# Altium PCB PCB3.PcbDoc
Units mil, origin at the board's own origin, x right, y up, seen from the top; angles counter-clockwise.
Board outline 2130.03 x 1040.03 mil, 2 copper layers (Top Layer, Bottom Layer); 10 components, 5 nets, 21 pads, 0 vias.
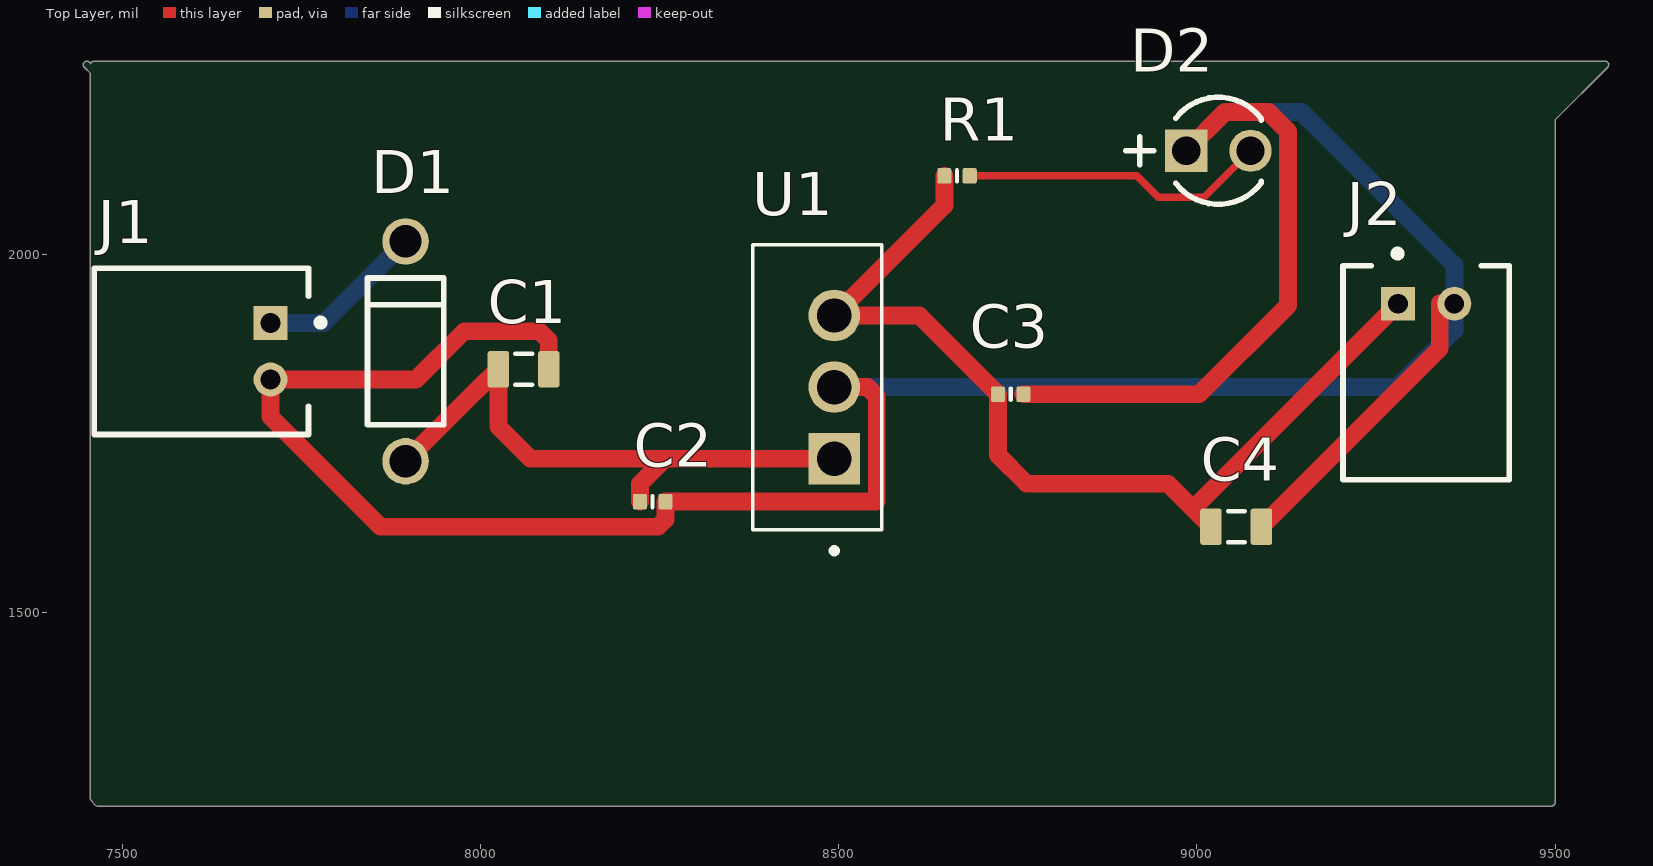
[diagram p0: Top Layer view]
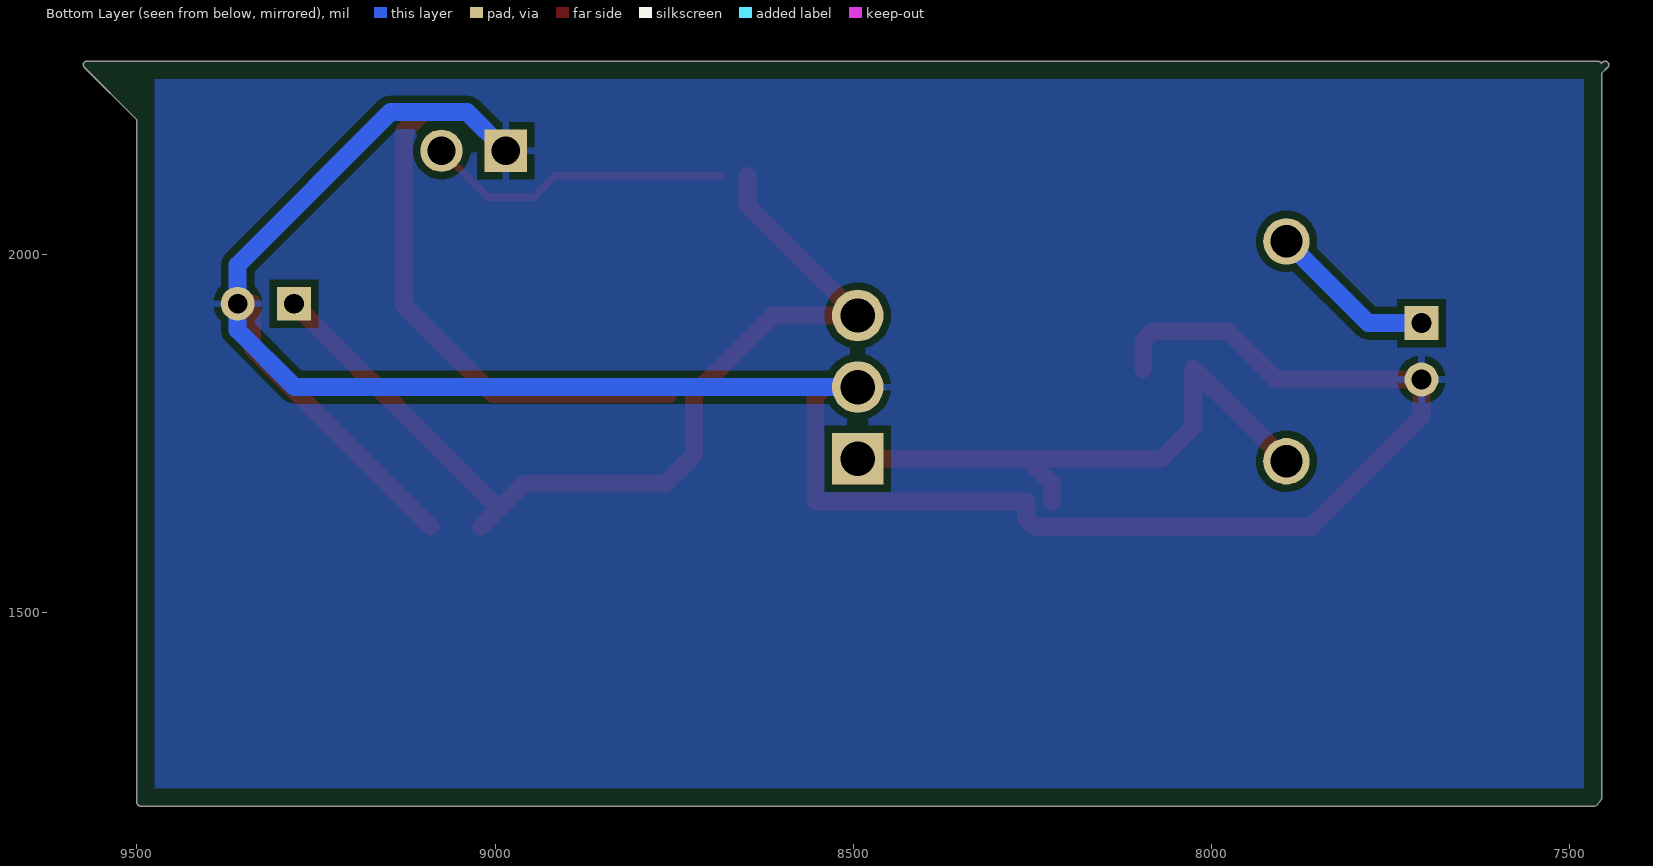
[diagram p1: Bottom Layer view, seen from below]
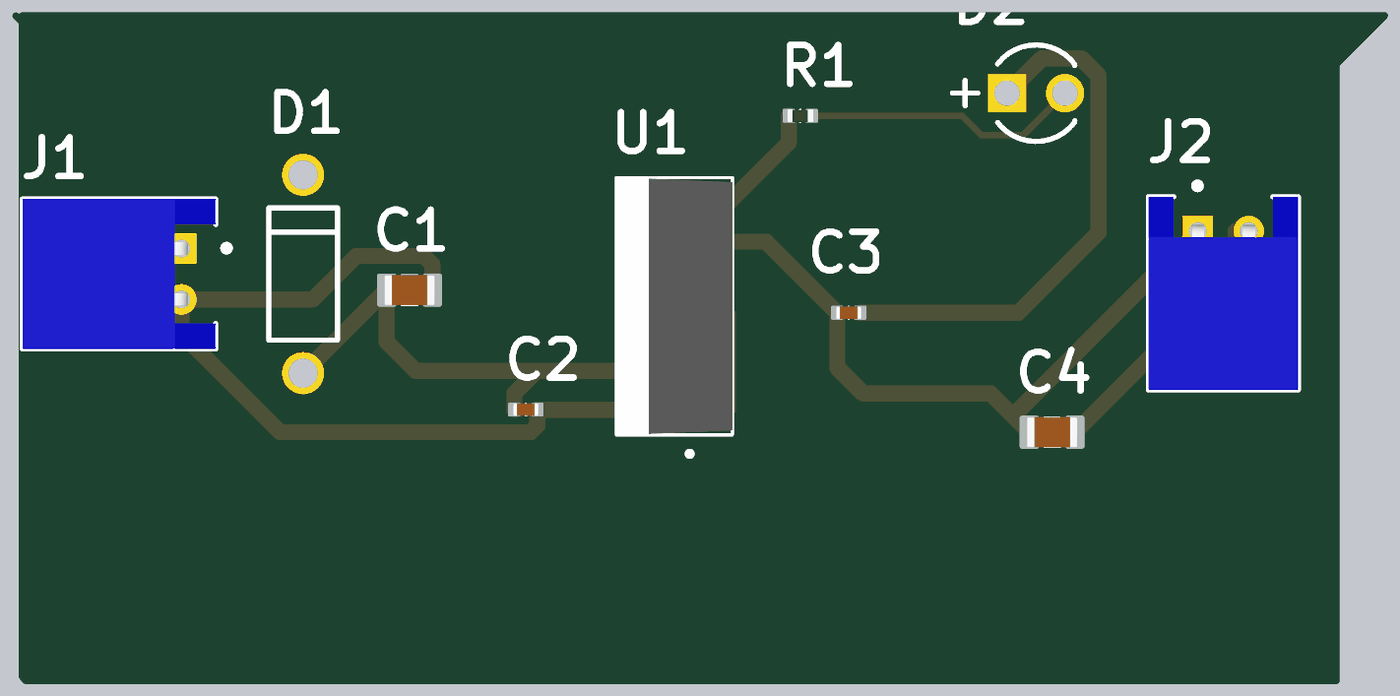
[diagram p2: 3D render of the assembled board from above, using the file's embedded part models]

## Layer stack, top to bottom
Top Solder: solder mask 0.4, Solder Resist, Dk 3.5
Top Layer: signal copper 1.4
Dielectric 1: dielectric 12.6, FR-4, Dk 4.8
Bottom Layer: signal copper 1.4
Bottom Solder: solder mask 0.4, Solder Resist, Dk 3.5

## Board outline
7454.98,1240 7454.98,2252.92 7446.45,2261.45 cw(c7450,2265) 7453.55,2268.55 7455.31,2266.78 cw(c7460,2265) 7460,2270.01 9570,2270.01 cw(c9570,2265) 9575.01,2265 9573.55,2261.45 9500.01,2187.92 9500.01,1235 cw(c9495,1235) 9495,1229.98 7465,1229.98 7461.45,1231.45

## Design rules (kind name [scope] priority, off if disabled: settings)
Clearance [All] p1: gap=10 ignorepadtopadclearanceinfootprint=FALSE
PolygonConnect [All] p1: connectstyle=Relief reliefconductorwidth=10 reliefentries=4 polygonreliefangle="90 Angle" airgapwidth=10
RoutingVias [All] p1: holewidth=28 width=50 viastyle="Through Hole" minholewidth=28 minwidth=50 maxholewidth=28 maxwidth=50
SolderMaskExpansion [All] p1: expansion=0 istentingtop=FALSE
SupplyNets "Schematic Supply Nets" [InNet('GND')] p1: voltage=0.000
Width Width_Power [InNetClass('Power')] p1: maxlimit=25 minlimit=25 preferedwidth=25
Width [All] p2: maxlimit=10 minlimit=10 preferedwidth=10
30 further rules are at their usual default settings.

## Classes and differential pairs
net class Power: GND NetC1_1 NetC3_1 NetD1_2

## Components (designator, comment, footprint, x,y, rotation, side; value= is the part's Value field where it differs from the comment)
C1 "Capacitor 10µF +/-20% 25V 0805" CAPC0805(2012)145_L 8060,1840 r0 top value=10µF
C2 "Capacitor 100nF +/-20% 25V 0402" CAPC0402(1005)60_L 8240,1655 r0 top value=100nF
C3 "Capacitor 100nF +/-20% 25V 0402" CAPC0402(1005)60_L 8740,1805 r0 top value=100nF
C4 "Capacitor 10µF +/-20% 25V 0805" CAPC0805(2012)145_L 9055,1620 r0 top value=10µF
D1 "1N4007" FAIR-DO-41-2 7895,1865 r90 top
D2 "304090041" LED-2P-2.28-3MM_A 9030,2145 r0 top
J1 "S2B-PH-K-S(LF)(SN)" JST-S2B-PH-K-S_V 7610,1865 r270 top
J2 "S2B-PH-K-S(LF)(SN)" JST-S2B-PH-K-S_V 9320,1835 r0 top
R1 "1KR2J" RESC0402(1005)_L 8665,2110 r0 top value=1k
U1 "LM7805T" TO254P1011X457X1950-3 8470,1815 r90 top

## Footprints (in the part's own frame and the unit in brackets; to place one, negate y for a bottom-side part, rotate by r counter-clockwise, add the part's x,y. Pads: shape width x height; smd on the part's side, far side on the other; paste and mask are expansions set on the pad)
CAPC0402(1005)60_L [mm] "Chip Capacitor, Body 1.0x0.5mm, Height 0.6mm, IPC High Density"
  rrect25% 0.5x0.55 smd: 1(-0.45,0) 2(0.45,0)
  silkscreen extent 0,-0.2 0,0.2, body extent -0.5,-0.25 0.5,0.25, height 0.6
CAPC0805(2012)145_L [mm] "Chip Capacitor, Body 2.0x1.2mm, Height 1.45mm, IPC High Density"
  rrect25% 0.76x1.3 smd: 1(-0.9,0) 2(0.89,0)
  silkscreen extent -0.3,-0.55 0.3,0.55, body extent -1,-0.6 1,0.6, height 1.45
FAIR-DO-41-2 [mm] "THD, 2-Leads, Body 5.2x2.72mm, Pin Spacing 7.8mm"
  round 1.65 hole 1.15: 1(-3.9,0) 2(3.9,0)
  silkscreen extent -2.6,-1.35 2.6,1.35, body extent -4.29,-1.17 4.29,1.17, height 2.35
JST-S2B-PH-K-S_V [mm] "THD, 2-Leads, Body 7.6x5.9mm, Pitch 2mm"
  rect 1.2x1.2 hole 0.7: 1(-1,2.45)
  round 1.2 hole 0.7: 2(1,2.45)
  silkscreen extent -2.95,-3.8 2.95,4.35, body extent -2.95,-3.8 2.95,3.8, height 4.8
LED-2P-2.28-3MM_A [mm] "LED, 2-Leads, Dia 3mm, Pitch 2.28mm"
  rect 1.5x1.5 hole 1: 1(-1.14,0)
  round 1.5 hole 1: 2(1.14,0)
  silkscreen extent -3.29,-1.9 1.52,1.9, body extent -1.9,-1.91 1.52,1.91, height 5.3
RESC0402(1005)_L [mm] "Chip Resistor, Body 1.0x0.5mm, IPC High Density"
  rrect25% 0.5x0.55 smd: 1(-0.45,0) 2(0.45,0)
  silkscreen extent 0,-0.2 0,0.2, body extent -0.5,-0.25 0.5,0.25, height 0.3
TO254P1011X457X1950-3 [mm]
  rect 1.83x1.83 / inner round 1.83 / far side rect 1.83x1.83 hole 1.22 mask+0.102: 1(-2.54,-0.6)
  round 1.83 hole 1.22 mask+0.102: 2(0,-0.6) 3(2.54,-0.6)
  silkscreen extent -5.9,-2.28 5.06,2.28, body extent -5.08,-2.28 5.08,2.28, height 19.5

## Part data
C1 C4: library part CMP-001-00079-4, "Chip Capacitor, 10µF +/-20%, 25V, 0805, Thickness 1.45 mm", Case/Package=0805, Max Operating Temperature=85°C, Min Operating Temperature=-55°C, Tolerance=10%, Voltage Rating=25V, Mounting Technology=SMT, Pins=2
C2 C3: library part CMP-001-00065-4, "Chip Capacitor, 100nF +/-20%, 25V, 0402, Thickness 0.6 mm", Case/Package=0402, Max Operating Temperature=85°C, Min Operating Temperature=-55°C, Tolerance=10%, Voltage Rating=25V, Mounting Technology=SMT, Pins=2
D1: library part CMP-004-00007-2, "General Purpose Rectifier, 1.1 V, 1.0 A, -55 to 175 degC, 2-Pin DO-41, RoHS, Tape and Reel", Case/Package=DO-41-2, Forward Current=1A, Forward Voltage=1.1V, Manufacturer=Fairchild, Max Operating Temperature=175°C, Max Surge Current=30A, Min Operating Temperature=-55°C, Package Description="2-Pin Axial Lead, Dia 2.375 mm, Body Length 4.63 mm", Package Quantity=5000, Package Version="Rev. 2, 09/2008", Peak Reverse Current=5uA, Datasheet URL=https://www.fairchildsemi.com/datasheets/1N/1N4007.pdf, Datasheet Version="Rev. 1.1.0, 11/2014", Elements=1, Manufacturer URL=https://www.fairchildsemi.com/, Mounting Technology=TH, Package Reference=DO-41-2, Package URL=http://www.fairchildsemi.com/dwg/DO/DO41A.pdf, Packaging=TapeandReel, Pins=2, RoHS Compliant=True
D2: library part CMP-007-00007-2, "Red LED, 80 mW, 30 mA, -25 to 85 degC, 2-Pin THD", Manufacturer="Shenzhen CGX", Package Description="2-Pin Through Hole Device, Dia 3 mm, Pitch 2.28 mm", Case/Package=304090041, Datasheet URL=http://datasheet.octopart.com/304090041-Chengguangxing-datasheet-62330656.pdf, Datasheet Version=Sep-14, Manufacturer URL=http://szcgx.com/, Mounting Technology=TH, Package Reference=304090041, RoHS Compliant=Unknown
J1 J2: library part CMP-002-00030-2, "Male Header, Pitch 2 mm, 1 x 2 Position, Height 4.8 mm, Tail Length 3.4 mm, -25 to 85 degC, RoHS, Bulk", Case/Package=S2B-PH-K-S, Manufacturer="Japan Solderless Terminals", Max Operating Temperature=85°C, Min Operating Temperature=-25°C, Package Description="Male Header, Pitch 2 mm, 1 x 2 Position, Height 4.8 mm, Tail Length 3.4 mm", Connector Type=Header, Datasheet URL=http://www.jst-mfg.com/product/pdf/eng/ePH.pdf, Datasheet Version=Dec-12, Gender=Male, Mounting Technology=SM, Package Reference=S2B-PH-K-S, RoHS Compliant=Unknown
R1: library part CMP-009-00075-2, "1K 0.063W 5% 0402 (1005 Metric)  SMD", Case/Package=0402, Power=63mW, Tolerance=5%, Mounting Technology=SMT, Pins=2
U1: "3-Terminal 1.5A Positive Fixed Voltage Regulator", Package="TO-220-3 TAEJIN", Check_prices=https://www.snapeda.com/parts/LM7805T/TAEJIN/view-part/?ref=eda, MF=TAEJIN, MP=LM7805T, SnapEDA_Link=https://www.snapeda.com/parts/LM7805T/TAEJIN/view-part/?ref=snap

## Nets (pads, with @x,y where several pads share a name; then routed paths per layer and width w, separated by ;. In a path a pad name is that pad's centre, name@x,y a point inside that pad or via, vN(x,y) a via of type N, cw(c..) or ccw(c..) an arc to the next point about the centre after c; other vN are vias at no path point)
GND: C1.2 C2.2 C3.2 C4.2 D2.1 J1.2 J2.2 U1.2 | length 4413.3
  Top Layer w25: C1.2 8095.04,1880 8082.04,1893 7977,1893 7909.63,1825.63 J1.2 7706.46,1773.54 7860,1620 8247.72,1620 8257.72,1630 C2.2 8552,1655 8553,1656 8553,1802 8540,1815 U1.2 ; C3.2 9003,1805 9127,1929 9127,2172 9100,2199 9039.12,2199 D2.1 ; C4.2 9339,1868.96 9339,1931.46 J2.2
  Bottom Layer w25: U1.2 9280,1815 9359.37,1894.37 J2.2 9359.37,1985.63 9146,2199 9039.12,2199 D2.1
NetC1_1: C1.1 C2.1 D1.1 U1.1 | length 824.7
  Top Layer w25: D1.1 7992.68,1809.13 C1.1 8024.57,1760 8069.57,1715 8257.28,1715 ; C2.1 8222.28,1680 8257.28,1715 ; U1.1 8257.28,1715
NetC3_1: C3.1 C4.1 J2.1 R1.1 U1.3 | length 1361.4
  Top Layer w25: R1.1 8647.28,2068.66 U1.3 8612.28,1915 C3.1 8722.28,1720 8762.28,1680 8959.57,1680 8994.37,1645.2 ; C4.1 8994.37,1645.2 ; J2.1 8994.37,1645.2
NetD1_2: D1.2 J1.1 | length 235.8
  Bottom Layer w25: J1.1 7780.83,1904.37 D1.2
NetD2_2: D2.2 R1.2 | length 431.5
  Top Layer w10: R1.2 8915.88,2110 8945.88,2080 9009.88,2080 D2.2

## Polygon pours and split planes (outlines as drawn)
GND on Bottom Layer "GND_L02_P000" (solid, pour order 0): 7480,1255 7480,2245 9475,2245 9475,1255

## Silkscreen, mask and mechanical layers (free items; w line width, h text height)
Mechanical 1:
  lines w10: 7450,2265 7460,2255 7460,1240 7465,1235 9495,1235 9495,2190 9570,2265 7460,2265